# Altium PCB SPILoRav5.PcbDoc
Units mil, origin at the board's own origin, x right, y up, seen from the top; angles counter-clockwise.
Board outline 1120 x 2890 mil, 2 copper layers (Top Layer, Bottom Layer); 32 components, 39 nets, 154 pads, 20 vias.
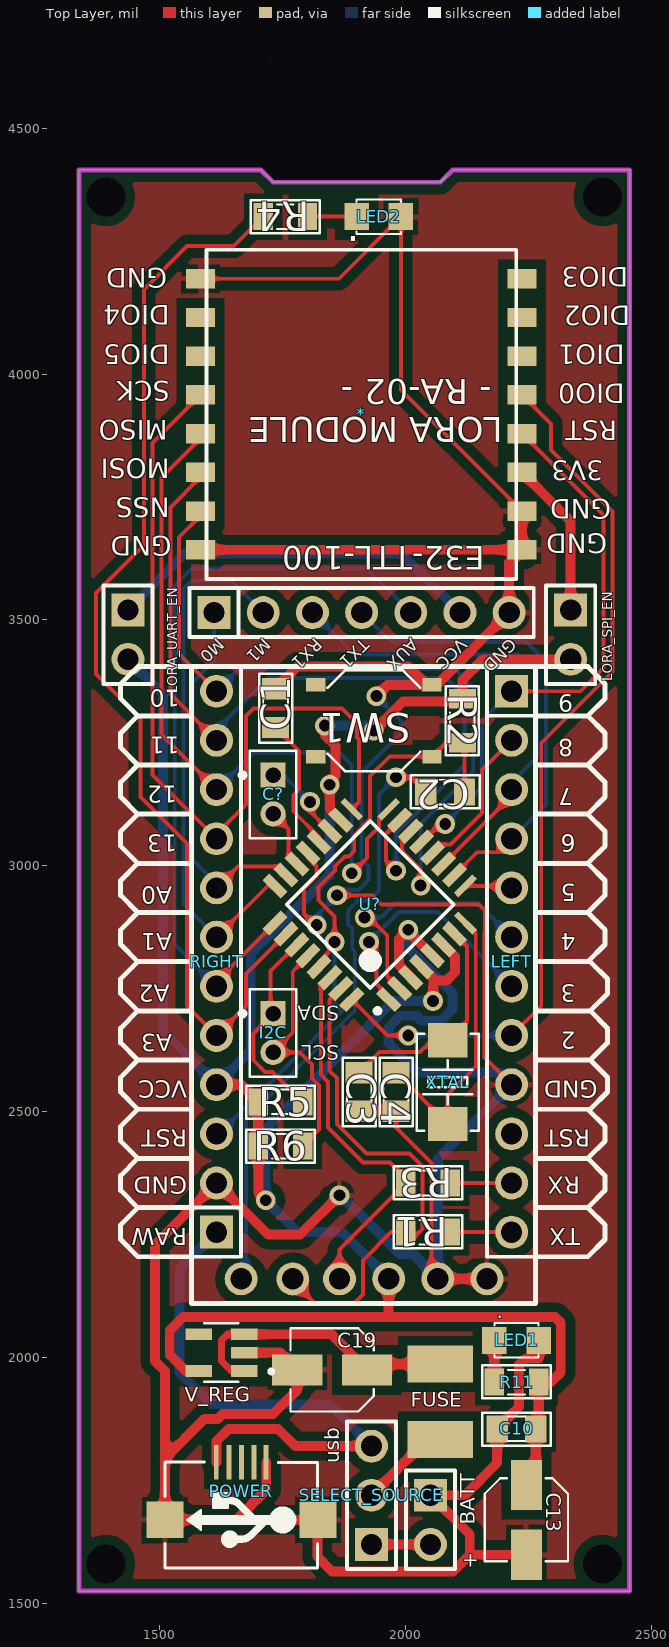
[diagram p0: Top Layer view]
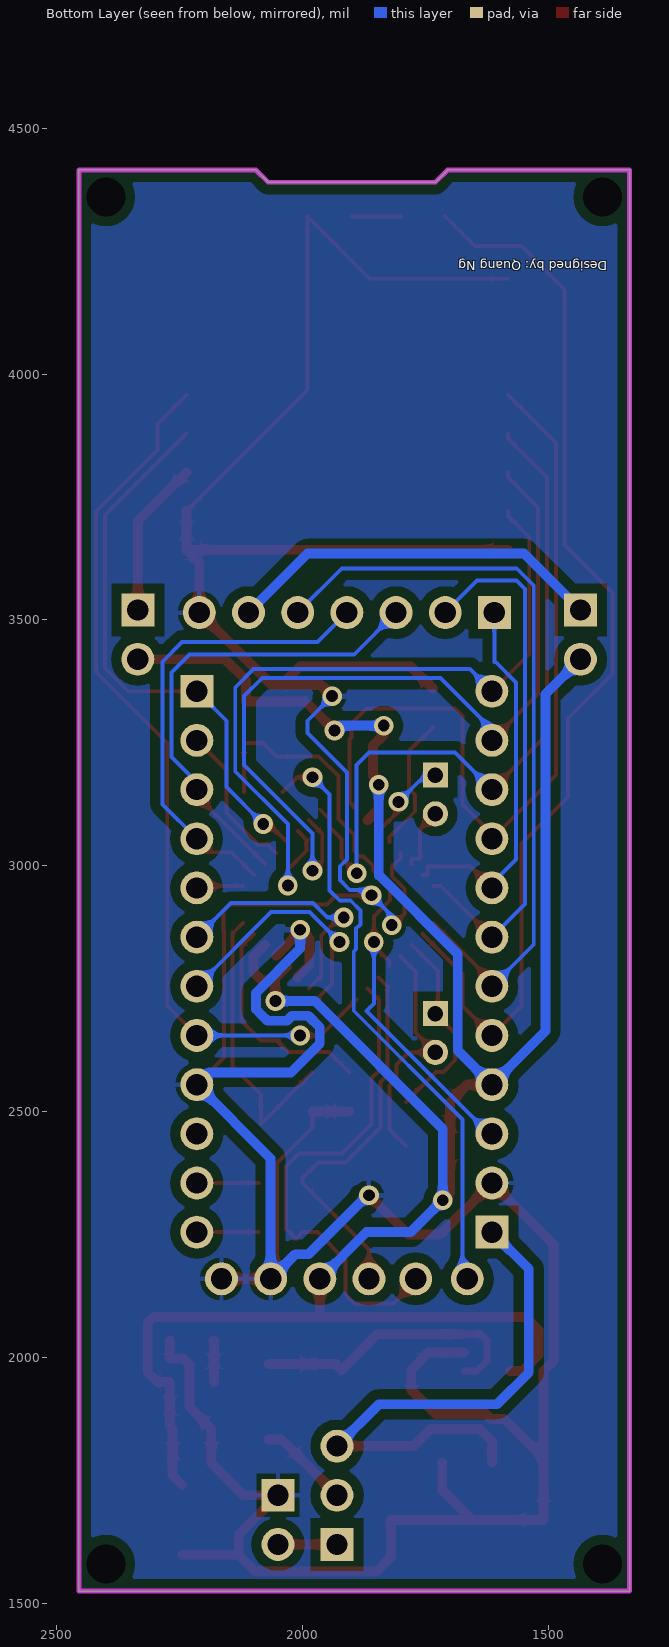
[diagram p1: Bottom Layer view, seen from below]
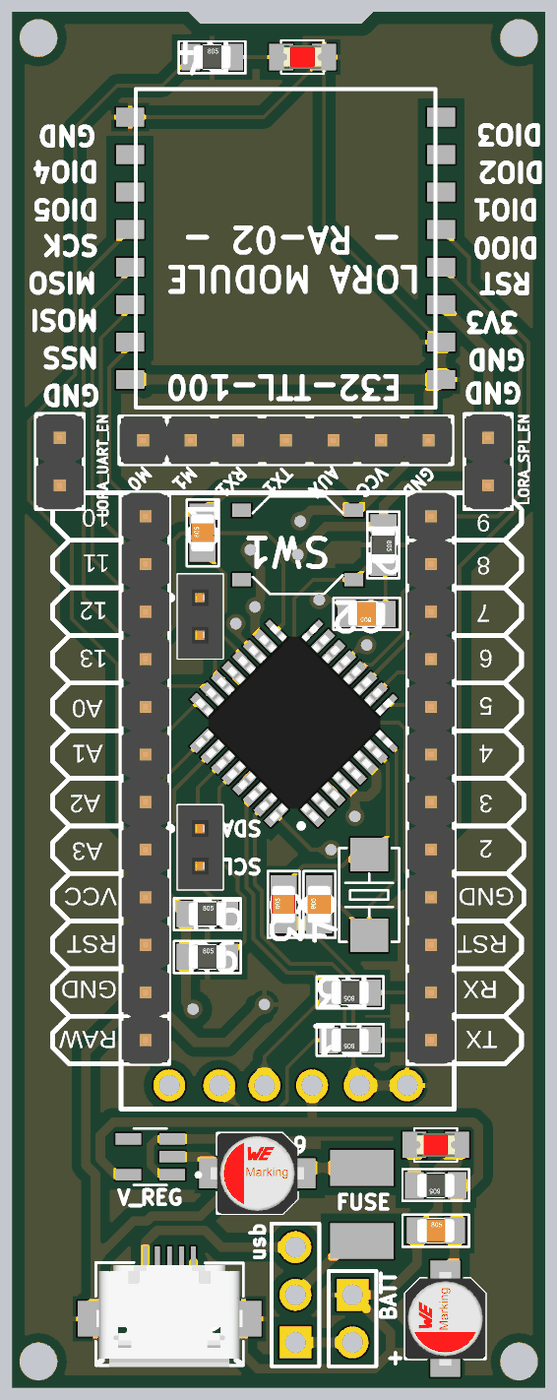
[diagram p2: 3D render of the assembled board from above, using the file's embedded part models]

## Layer stack, top to bottom
Top Solder: solder mask 0.4, Solder Resist, Dk 3.5
Top Layer: signal copper 1.4
Dielectric 1: dielectric 12.6, FR-4, Dk 4.8
Bottom Layer: signal copper 1.4
Bottom Solder: solder mask 0.4, Solder Resist, Dk 3.5

## Board outline
1335,1525 1335,4415 1705,4415 1730,4390 2070,4390 2095,4415 2455,4415 2455,1525

## Design rules (kind name [scope] priority, off if disabled: settings)
Clearance [All] p1: gap=10 ignorepadtopadclearanceinfootprint=FALSE except(0: Arc-Hole Track-Hole SMDPad-Hole THPad-Hole Via-Hole Fill-Hole Poly-Hole Region-Hole Text-Hole; 20: Arc-Poly Track-Poly SMDPad-Poly THPad-Poly Via-Poly Fill-Poly Poly-Poly Poly-Region Poly-Text)
PolygonConnect [All] p1: connectstyle=Relief reliefconductorwidth=10 reliefentries=4 polygonreliefangle="90 Angle" airgapwidth=10
RoutingTopology [All] p1: topology=Daisy_Simple
RoutingVias [All] p1: holewidth=24 width=40 viastyle="Through Hole" minholewidth=24 minwidth=40 maxholewidth=28 maxwidth=50
SolderMaskExpansion [All] p1: expansion=4
Width [All] p1: maxlimit=20 minlimit=8 preferedwidth=8 minimp=50.000000 maximp=50.000000 favimp=50.000000
29 further rules are at their usual default settings.

## Components (designator, comment, footprint, x,y, rotation, side; value= is the part's Value field where it differs from the comment)
* "RA-02" RA-02 1915,3870 r180 top
BATT "Header 2" HDR1X2 2050,1720 r270 top
C1 "0.1uF" CN-SMD-0805 1735.01,3320.63 r90 top value=33pF
C2 "0.1uF" CN-SMD-0805 2080,3150 r180 top value=33pF
C3 "0.1uF" CN-SMD-0805 1905,2540 r90 top value=33pF
C4 "0.1uF" CN-SMD-0805 1980,2540 r90 top value=33pF
C10 "0.1uF" CN-SMD-0805 2225,1855 r0 top value=33pF
C13 "10uF" CAP-ALU-SMD-4.5x5x1.4 2245,1670 r270 top
C19 "10uF" CAP-ALU-SMD-4.5x5x1.4 1850,1975 r180 top
C? "JP2x1-2.0" J2-C1T 1730,3145 r270 top
E32-TTL-100 "JP7" JP7-D1T 1610,3515 r0 top
FUSE "MF-MSMF050-2" *FUSM1812X02 2070,1910 r90 top
I2C "JP2x1-2.0" J2-C1T 1730,2660 r270 top
LED1 "LED" LED-0805-Red 2180,2035 r0 top value="LED 3 - 5 ly 2 Colour"
LED2 "LED" LED-0805-Red 1900,4320 r0 top value="LED 3 - 5 ly 2 Colour"
LEFT "JP12" JP12-D1T 2215,3355 r270 top
LORA_SPI_EN "JP2" JP2-D1T 2335,3520 r270 top
LORA_UART_EN "JP2" JP2-D1T 1435,3520 r270 top
POWER "USB-5" USB-M1 1665.51,1786.84 r180 top
R1 "1K" RES-SMD-0805 2045,2255 r180 top
R2 "10K" RES-SMD-0805 2115,3295 r270 top
R3 "1K" RES-SMD-0805 2045,2355 r180 top
R4 "4.7K" RES-SMD-0805 1755,4320 r0 top
R5 "1K" RES-SMD-0805 1745,2520 r0 top
R6 "1K" RES-SMD-0805 1745,2430 r0 top
R11 "4.7K" RES-SMD-0805 2225,1950 r180 top
RIGHT "JP12" JP12-D1T 1615,2255 r90 top
SELECT_SOURCE "Header 3" HDR1X3 1930,1620 r90 top
SW1 "BUTTON" *SW4-SMD-5.2X5.2X1.5MM 1935,3295 r180 top
U? "ATmega328-AU" TQFP32 1927.58,2921.52 r135 top
V_REG "MIC5205-3.3BM5_TR" *SOT95P280X145-5N 1625,2010 r180 top
XTAL "5032 8MHz" *X2-SMD-5.0X3.2X1.3MM 2085,2560 r270 top

## Footprints (in the part's own frame and the unit in brackets; to place one, negate y for a bottom-side part, rotate by r counter-clockwise, add the part's x,y. Pads: shape width x height; smd on the part's side, far side on the other; paste and mask are expansions set on the pad)
*FUSM1812X02 [mm]
  rect 1.9x3.4 smd: 1(-1.95,0) 2(1.95,0)
*SOT95P280X145-5N [mm]
  rect 1.36x0.6 smd: 1(-1.175,0.95) 2(-1.175,0) 3(-1.175,-0.95) 4(1.175,-0.95) 5(1.175,0.95)
  silkscreen extent -2.67,-1.51 0.88,1.51
*SW4-SMD-5.2X5.2X1.5MM [mm]
  rect 1x0.7 smd: 1(-3,1.85) 2(3,1.85) 3(-3,-1.85) 4(3,-1.85)
  silkscreen extent -2.4,-2.6 2.4,2.6
*X2-SMD-5.0X3.2X1.3MM [mil]
  rect 70x80 smd: 1(-85,0) 2(85,0)
  silkscreen extent -98,-63 98,63
CAP-ALU-SMD-4.5x5x1.4 [mm]
  rect 2.6x1.6 smd: 1(-1.8,0) 2(1.8,0)
  silkscreen extent -2.15,-2.15 2.15,2.15, body extent -2.5,-2.15 2.5,2.15, height 5.45
CN-SMD-0805 [mil]
  rect 43.31x55 smd: 1(-39.37,0.01) 2(39.37,0.01)
  silkscreen extent -70,-34 70,33, body extent -39,-25 39,25, height 31
HDR1X2 [mm] "Connector; Header; 2 Position"
  rect 1.7x1.7 hole 1.1: 1(0,0)
  round 1.7 hole 1.1: 2(2.54,0)
  silkscreen extent -1.27,-1.27 3.81,1.27
HDR1X3 [mm] "Connector; Header; 3 Position"
  rect 1.7x1.7 hole 1.1: 1(0,0)
  round 1.7 hole 1.1: 2(2.54,0) 3(5.08,0)
  silkscreen extent -1.27,-1.27 6.35,1.27
J2-C1T [mm] "2p, 1 row, straight, gold plating"
  rect 1.3x1.3 hole 0.8: 1(-1,0)
  round 1.3 hole 0.8: 2(1,0)
  silkscreen extent -2.25,-1.71 2.25,1.2, body extent -2.25,-1.2 2.25,1.2, height 4.31
JP2-D1T [mm] "2 pins, 1 row, straight, gold plating"
  rect 1.7x1.7 hole 1.1: 1(0,0)
  round 1.7 hole 1.1: 2(2.54,0)
  silkscreen extent -1.27,-1.27 3.81,1.27, body extent -1.27,-1.27 3.81,1.27, height 8.54
JP7-D1T [mm] "7 pins, 1 row, straight, gold plating"
  rect 1.7x1.7 hole 1.1: 1(0,0)
  round 1.7 hole 1.1: 2(2.54,0) 3(5.08,0) 4(7.62,0) 5(10.16,0) 6(12.7,0) 7(15.24,0)
  silkscreen extent -1.27,-1.27 16.51,1.27, body extent -1.27,-1.27 16.51,1.27, height 8.54
JP12-D1T [mm] "12 pins, 1 row, straight, gold plating"
  rect 1.7x1.7 hole 1.1: 1(0,0)
  round 1.7 hole 1.1: 2(2.54,0) 3(5.08,0) 4(7.62,0) 5(10.16,0) 6(12.7,0) 7(15.24,0) 8(17.78,0) 9(20.32,0) 10(22.86,0) 11(25.4,0) 12(27.94,0)
  silkscreen extent -1.27,-1.27 29.21,1.27, body extent -1.27,-1.27 29.21,1.27, height 8.54
LED-0805-Red [mil]
  rect 50x55 smd: 1(0,0) 2(90,0)
  silkscreen extent 0,-35 90,35, body extent 5,-25 85,25, height 43
RA-02 [mm]
  rect 1.5x1 smd: 1(-8.157,5.776) 2(-8.157,3.776) 3(-8.157,1.776) 4(-8.157,-0.224) 5(-8.157,-2.224) 6(-8.157,-4.224) 7(-8.157,-6.224) 8(-8.157,-8.224) 9(8.443,-8.224) 10(8.443,-6.224) 11(8.443,-4.224) 12(8.443,-2.224) 13(8.443,-0.224) 14(8.443,1.776) 15(8.443,3.776) 16(8.443,5.776)
  silkscreen extent -7.86,-9.72 8.14,7.28
RES-SMD-0805 [mil]
  rect 39.37x55 smd: 1(-45,0) 2(45,0)
  silkscreen extent -70,-34 70,33, body extent -39,-25 39,25, height 31
TQFP32 [mm] "Thin QFP, 32-Leads, Body 9x9mm, Pitch 0.8mm, IPC Low Density"
  rect 1.35x0.508 smd: 1(-4.15,2.8) 2(-4.15,2) 3(-4.15,1.2) 4(-4.15,0.4) 5(-4.15,-0.4) 6(-4.15,-1.2) 7(-4.15,-2) 18(4.15,-2) 19(4.15,-1.2) 20(4.15,-0.4) 21(4.15,0.4) 22(4.15,1.2) 23(4.15,2) 24(4.15,2.8)
  rect 1.35x0.33 smd: 8(-4.15,-2.8) 17(4.15,-2.8)
  rect 0.33x1.35 smd: 9(-2.8,-4.15) 16(2.8,-4.15)
  rect 0.508x1.35 smd: 10(-2,-4.15) 11(-1.2,-4.15) 12(-0.4,-4.15) 13(0.4,-4.15) 14(1.2,-4.15) 15(2,-4.15) 25(2.8,4.15) 26(2,4.15) 27(1.2,4.15) 28(0.4,4.15) 29(-0.4,4.15) 30(-1.2,4.15) 31(-2,4.15) 32(-2.8,4.15)
  silkscreen extent -4.27,-3.05 3.05,3.75, body extent -4.5,-4.5 4.5,4.5, height 1.4
USB-M1 [mil]
  rect 10x70 smd: 1(51.18,0) 2(25.59,0) 3(0,0) 4(-25.59,0) 5(-50,0)
  rect 74.8x74.8 smd: 5(-155.51,116.84) 5(155.51,116.84)
  silkscreen extent -155,-1 155,215, body extent -157,5 158,218, height 107

## Part data
BATT: "Header, 2-Pin", LatestRevisionDate=17-Jul-2002, LatestRevisionNote="Re-released for DXP Platform.", Publisher="Altium Limited"
C1 C2 C3 C4 C10: library part CN
C13 C19: library part CN-ALU-SMD, "Polarized Capacitor (Axial)", LatestRevisionDate=17-Jul-2002, LatestRevisionNote="Re-released for DXP Platform.", PackageReference=POLAR0.8, Published=8-Jun-2000, Publisher="Altium Limited"
C? I2C: "WR-PHD 2.00 mm Socket Header", Manufacturer="Würth Elektronik eiSos GmbH", partNo=62000211821, ComponentLink1 Description=Manufacturer, ComponentLink1URL=http://www.we-online.com, ComponentLink2 Description=Datasheet, ComponentLink2URL=http://katalog.we-online.de/em/datasheet/6200xx11821.pdf, Created by="Karrer Zheng", Created Date="2 April 2013", NoPins=02
E32-TTL-100: "WR-PHD 2.54 mm Angled Socket Header", Manufacturer="Würth Elektronik eiSos GmbH", partNo=613007143121, ComponentLink1 Description=Manufacturer, ComponentLink1URL=http://www.we-online.com, ComponentLink2 Description=Datasheet, ComponentLink2URL=http://katalog.we-online.de/em/datasheet/6130xx143121.pdf, Created by="Karrer Zheng", Created Date="29 March 2013", NoPins=07
FUSE: "PTC Resettable Fuse 0.5A_hold_ 1A_trip_ 15V 100A 0.8W 0.15s 0.15Ohm SMD Solder Pad 1812 T/R", Package="1812 Bourns", Availability=Unavailable, MF=Bourns, MP=MF-MSMF050-2, Price=None, SnapEDA_Link=https://www.snapeda.com/parts/MF-MSMF050-2/Bourns%20-%20J.W.%20Miller/view-part/?ref=snap
LED1 LED2: library part "LED SMD"
LEFT RIGHT: "WR-PHD 2.54 mm Angled Socket Header", Manufacturer="Würth Elektronik eiSos GmbH", partNo=613012143121, ComponentLink1 Description=Manufacturer, ComponentLink1URL=http://www.we-online.com, ComponentLink2 Description=Datasheet, ComponentLink2URL=http://katalog.we-online.de/em/datasheet/6130xx143121.pdf, Created by="Karrer Zheng", Created Date="29 March 2013", NoPins=12
LORA_SPI_EN LORA_UART_EN: "WR-PHD 2.54 mm Angled Socket Header", Manufacturer="Würth Elektronik eiSos GmbH", partNo=613002143121, ComponentLink1 Description=Manufacturer, ComponentLink1URL=http://www.we-online.com, ComponentLink2 Description=Datasheet, ComponentLink2URL=http://katalog.we-online.de/em/datasheet/6130xx143121.pdf, Created by="Karrer Zheng", Created Date="29 March 2013", NoPins=02
POWER: Manufacturer=FCI, Manufacturer Part Number=10118193-0001LF, Supplier Part Number 1=609-4616-1-ND, .Checked PCB=RF, .Checked SCH=MM, .Creator=MM, Category="Connectors, Interconnects", ComponentLink1Description=http://portal.fciconnect.com/Comergent//fci/drawing/10118193.pdf, ComponentLink1URL=http://portal.fciconnect.com/Comergent//fci/drawing/10118193.pdf, Connector Type="USB - micro B", Features="Shielded, Solder Retention", Gender=Receptacle, Ingress Protection=-, Mounting Type="Surface Mount, Right Angle, Horizontal", Number of Contacts=5, Packaging="Cut Tape (CT)", Pricing 1="1=0.46, 10=0.433, 25=0.3712, 50=0.3156, 100=0.3032, 250=0.27224, 500=0.25988 (USD)", RoHS="RoHS Compliant", Specifications="USB 2.0", Stock 1=28642, Supplier 1=Digi-Key
R1 R2 R3 R4 R5 R6 R11: library part Res-SMD, "Resistor", Manufacturer="Generic Components", Class=Passive, Published=08/06/2000, Publisher="Altium Hobart Technology Centre"
SELECT_SOURCE: "Header, 3-Pin", LatestRevisionDate=17-Jul-2002, LatestRevisionNote="Re-released for DXP Platform.", Publisher="Altium Limited"
SW1: library part SMD-BUTTON(4P-5.2X5.2X1.5MM-SKQGAKE010), "Switch Tactile N.O. SPST Button Gull Wing 0.05A 12VDC 3.43N SMD T/R", Package=None, Availability=Unavailable, MF=ALPS, MP=SKQGAKE010, Price=None, SnapEDA_Link=https://www.snapeda.com/parts/SKQGAKE010/ALPS/view-part/?ref=snap
U?: "8-bit AVR Microcontroller, 32KB Flash, 1KB EEPROM, 2KB SRAM, 32-pin TQFP, Industrial Grade (-40癈 to 85癈)", Supplier Part Number 1=ATMEGA328-AU-ND, Code_JEDEC=MS-026-ABA, ComponentLink1Description="Manufacturer Link", ComponentLink1URL=http://www.atmel.com/products/avr/default.asp?, ComponentLink2Description="ATmega48A/48PA/88A/88PA/168A/168PA/328/328P Datasheet", ComponentLink2URL=http://www.atmel.com/dyn/resources/prod_documents/8271.pdf, ComponentLink3Description="ATmega48A/48PA/88A/88PA/168A/168PA/328/328P Summary", ComponentLink3URL=http://www.atmel.com/dyn/resources/prod_documents/8271S.pdf, ComponentLink4Description="Atmel.com Home", ComponentLink4URL=http://www.atmel.com, DatasheetVersion="revA, Jan-2010", PackageDescription="32-Lead, 7x7x1.0 mm Body, 0.8mm Lead Pitch, Thin Profile Plastic Quad Flat Package (TQFP)", PackageReference=32A, PackageVersion="revB, Oct-2001", Published=1-Apr-2010, Publisher="Altium Limited", Supplier 1=Digi-Key, Supplier 2=Mouser, Supplier Part Number 2=556-ATMEGA328-AU
V_REG: "Ic Reg Ldo 3.3v 0.15a Sot23-5", Package="SOT-23-5 Micrel", Availability=Unavailable, MF=Micrel, MP="MIC5205-3.3BM5 TR", Price=None, SnapEDA_Link=https://www.snapeda.com/parts/MIC5205-3.3BM5%20TR/Micrel/view-part/?ref=snap
XTAL: library part SMD-CRYSTAL-8MHZ-20PF-20PPM(2P-5.0X3.2MM), "SMD Crystal 8MHz-20pF-20ppm;", Package=None, Availability=Unavailable, MF=Xinhunjing, MP=5032/4P, Price=None, SnapEDA_Link=https://www.snapeda.com/parts/5032/4P/Xinhunjing/view-part/?ref=snap

## Free pads (board coordinates)
  round 66.93 hole 43.31: 3(1665,2160) 3(1770,2160) 3(1865,2160) 3(1965,2160) 3(2065,2160) 3(2165,2160)
  round 60 hole 78.74: 4(1390,1580) 4(1390,4360) 4(2400,1580) 4(2400,4360)

## Via types
v1: diameter 40, hole 24, Top Layer to Bottom Layer, tented both sides, 20 vias

## Nets (pads, with @x,y where several pads share a name; then routed paths per layer and width w, separated by ;. In a path a pad name is that pad's centre, name@x,y a point inside that pad or via, vN(x,y) a via of type N, cw(c..) or ccw(c..) an arc to the next point about the centre after c; other vN are vias at no path point)
AUX: E32-TTL-100.5 RIGHT.6 U?.25 | length 1560.3
  Top Layer w8: RIGHT.6 1615,2764.84 U?.25
  Bottom Layer w8: RIGHT.6 1530,2840 1530,3570 1565,3605 1920,3605 E32-TTL-100.5
B1: *.4 LEFT.1 U?.13 | length 1141.2
  Top Layer w8: U?.13 2068.79,3085 v1(2080,3085) ; LEFT.1 2355,3355 2402,3402 2402,3712.96 *.4
  Bottom Layer w8: v1(2080,3085) 2155,3160 2155,3295 LEFT.1
BATT: BATT.2 SELECT_SOURCE.1 | length 120
  Top Layer w20: SELECT_SOURCE.1 BATT.2
D2: *.5 LEFT.8 U?.32 | length 1840.1
  Top Layer w8: U?.32 1963.04,2655 v1(2005,2655) ; LEFT.8 2275.23,2715.23 2275.23,3249.77 2420,3394.54 2420,3720.42 2295,3845.42 2295,3898.7 *.5
  Bottom Layer w8: v1(2005,2655) LEFT.8 LEFT.8@2230,2670
D3: LEFT.7 U?.1 | length 511.4
  Top Layer w8: v1(1925,2845) 1940,2830 1940,2760 1965.16,2734.84 U?.1
  Bottom Layer w8: v1(1925,2845) 1986,2906 2064,2906 LEFT.7
GND: *.1 *.2 *.9 *.16 BATT.1 C1.2 C3.1 C4.1 C10.1 C13.2 C19.2 E32-TTL-100.7 LED1.2 LED2.2 LEFT.9 pad.3@2065,2160 pad.3@2165,2160 POWER.5 RIGHT.2 SW1.3 U?.3 U?.5 U?.21 V_REG.2 | length 9477.8
  Top Layer w8: *.9 1863.78,4193.78 LED2.2 1990,3967.48 *.2 ; U?.21 1800.92,3015.31 1818.51,2997.72 1818.51,2978.8 1793,2953.3 1793,2902 1815.62,2879.38 v1(1818.67,2879.38) ; v1(1860,2940) 1931.71,2940 1950,2921.71 2148.29,2921.71 2160.92,2909.08 2160.92,2866.42 2160.11,2865.61 2160.11,2609.89 LEFT.9 LEFT.9@2215,2565 ; C4.1 1979.99,2467.45 2051.69,2395.75 2051.69,2173.31 pad.3@2065,2160
  Top Layer w20: *.16 *.1 ; V_REG.2 1744.13,2010 C19.2 1779.13,1934.13 1730,1885 1627.37,1885 1617.37,1875 1590,1875 1510,1795 ; POWER.5@1716.1,1786.84 1716.1,1731.1 1655,1670 ; C1.2 1780,3405 2005,3405 SW1.3@2042.17,3367.83 ; v1(1865,2330) 1785,2250 1720,2250 RIGHT.2 1490,2230 1490,1992.57 1510,1972.57 1510,1795 ; C3.1 C4.1 ; v1(1940,3345) 1962.83,3367.83 SW1.3@2042.17,3367.83 ; U?.3 2009.71,2774.7 1986.12,2798.29 1986.12,2851.12 v1(2005,2870) 2005,2866.37 U?.5 ; pad.3@2065,2160 pad.3@2165,2160 ; *.2 *.1 ; C13.2 2130,1599.13 ; LED1.2 2270,1997.5 2242.03,1997.5 2230.32,1985.78 2230.32,1899.69 C10.1 2185.64,1785.64 2120,1720 BATT.1 2130,1640 2130,1599.13 ; 1510,1795 1510,1670 1655,1670 ; 1655,1670 1821.02,1670 1820,1668.98 1820,1595 1850,1565 2095.87,1565 2130,1599.13 ; SW1.3@2042.17,3367.83 SW1.3 2062.83,3367.83 E32-TTL-100.7 2210,3616.46 *.1
  Bottom Layer w8: v1(1818.67,2879.38) 1818.67,2891.33 1815,2895 v1(1860,2940) 1871,2951 1904.08,2951 1924,2970.92 1924,2999.08 1910,3013.08 1910,3190 1990,3270 1990,3295 v1(1940,3345)
  Bottom Layer w20: v1(1865,2330) 1867.83,2330 1987.83,2210 2015,2210 2065,2160 2065,2405 LEFT.9 2190,2580 2023.43,2580 1965,2638.43 1965,2671.57 1988.43,2695 2021.57,2695 2031.57,2685 2071.57,2685 2083.28,2696.72 2095,2708.43 2095,2741.57 2005,2831.57 v1(2005,2870)
LORA_SPI_VCC: *.3 LORA_SPI_EN.1 | length 321
  Top Layer w20: *.3 2335,3701.22 LORA_SPI_EN.1
LORA_UART_VCC: E32-TTL-100.6 LORA_UART_EN.1 | length 772.3
  Bottom Layer w20: LORA_UART_EN.1 1550,3635 1990,3635 E32-TTL-100.6
M0: E32-TTL-100.1 RIGHT.8 U?.23 | length 777.3
  Top Layer w8: RIGHT.8 1658.96,2998.96 1745.77,2998.96 1745.77,2981.37 U?.23
  Bottom Layer w8: E32-TTL-100.1 1610,3414.34 1607.22,3414.34 1566,3373.12 1566,3013.01 1615,2964.01 RIGHT.8
M1: E32-TTL-100.2 RIGHT.7 U?.24 | length 1093.7
  Top Layer w8: RIGHT.7 1719.1,2959.1 U?.24
  Bottom Layer w8: RIGHT.7 1548,2922 1548,3562.54 1565.46,3580 1645,3580 E32-TTL-100.2
MISO: *.13 RIGHT.10 U?.16 | length 1500.7
  Top Layer w8: *.13 1582.6,3869.09 1503.07,3789.56 1503.07,3266.93 RIGHT.10 ; v1(1890,2985) 1920.71,3015.71 1920.71,3054.38 1945.39,3079.05 1945.39,3095.22 U?.16
  Bottom Layer w8: RIGHT.10 1690,3230 1865,3230 1890,3205 v1(1890,2985)
MOSI: *.14 RIGHT.11 U?.15 | length 1729.2
  Top Layer w8: *.14 1582.6,3790.35 1521.07,3728.82 1521.07,3348.93 RIGHT.11 ; v1(1980,2990) 1960,3010 1960,3065.29 U?.15
  Bottom Layer w8: RIGHT.11 1615,3277 1720,3382 2082,3382 2119,3345 2119,3204.58 1980,3065.58 v1(1980,2990)
NetC1_1: C1.1 U?.20 | length 279.7
  Top Layer w8: C1.1 1783.2,3233.06 1783.2,3156.29 1771,3144.08 1771,3110.97 1823.19,3058.79 U?.20
NetC2_2: C2.2 pad.3@1665,2160 | length 1247.8
  Top Layer w8: v1(1980,3180) 2010.62,3180 C2.2
  Bottom Layer w8: pad.3@1665,2160 1675,2170 1675,2484.18 1896,2705.18 1896,2825.92 1891,2830.92 1891,2872.08 1882.17,2880.92 1882.17,2909.08 1902.08,2929 1924,2929 1945,2950 1945,3145 v1(1980,3180)
NetC3_2: C3.2 U?.7 XTAL.1 | length 452.9
  Top Layer w8: C3.2 1946.62,2621 2029.08,2621 2049,2640.92 2049,2645 XTAL.1 2124.11,2684.11 2124.11,2836.35 U?.7
NetC4_2: C4.2 U?.8 XTAL.2 | length 589.6
  Top Layer w8: C4.2 1980.63,2579.37 XTAL.2 2085,2535 2142.11,2592.11 2142.11,2862.89 U?.8
NetC19_1: C19.1 FUSE.2 V_REG.1 V_REG.3 | length 581.8
  Top Layer w15: V_REG.1 1645.33,1972.6 1625,1992.93 1625,2035 1637.4,2047.4 V_REG.3
  Top Layer w20: V_REG.3 1848.46,2047.4 C19.1 1932.64,1986.77 FUSE.2
NetC?_1: C?.1 U?.19 | length 175.4
  Top Layer w8: C?.1 C?.1@1731.55,3184.37 ; v1(1805,3130) 1805,3110.92 U?.19
  Bottom Layer w8: C?.1 1750.63,3184.37 v1(1805,3130)
NetC?_2: C?.2 U?.22 | length 132.4
  Top Layer w8: C?.2 1761.05,3074.58 1761.05,3014.25 1778.64,3014.25 U?.22
NetFTDI_4: pad.3@1865,2160 R3.2 U?.30 | length 780.3
  Top Layer w8: U?.30 1827,2754.12 1827,2575.44 1841.68,2560.75 1841.68,2467.86 1912.54,2397 1968,2397 2000,2365 R3.2 1865,2220 pad.3@1865,2160
NetFTDI_5: pad.3@1770,2160 R1.2 U?.31 | length 1029.6
  Top Layer w8: pad.3@1770,2160 1770,2155 1815,2110 1894.59,2110 1912.46,2127.88 1912.46,2197.46 1970,2255 R1.2 2013.69,2241.32 2033.69,2261.31 2033.69,2388.3 2006.98,2415 1920,2415 1859.68,2475.32 1859.68,2568.21 1845,2582.89 1845,2727.58 U?.31
NetFUSE_1: FUSE.1 SELECT_SOURCE.2 | length 186.9
  Top Layer w20: SELECT_SOURCE.2 2043.23,1833.23 FUSE.1
NetI2C_1: I2C.1 R5.2 U?.27 | length 410.7
  Top Layer w8: U?.27 1725,2785.75 1725,2704.37 I2C.1 1690,2659.37 1690,2604.64 1713.6,2581.04 1728.96,2581.04 R5.2
NetI2C_2: I2C.2 R6.2 U?.28 | length 501.1
  Top Layer w8: R6.2 1823.68,2463.69 1823.68,2553.3 1809,2567.98 1809,2596 1784.37,2620.63 I2C.2 1770,2660.63 1770,2785 1800.92,2815.92 U?.28
NetLED1_1: LED1.1 R11.2 | length 85
  Top Layer w20: R11.2 LED1.1
NetLED2_1: LED2.1 R4.2 | length 100
  Top Layer w8: R4.2 LED2.1
NetLEFT_2: LEFT.2 U?.12 | length 306.8
  Top Layer w8: U?.12 2071.84,3043.51 2090.93,3043.51 2155,3107.58 2155,3116.66 ; 2155.02,3116.68 2155.02,3195.02 LEFT.2
NetLEFT_5: LEFT.5 U?.9 | length 95.6
  Top Layer w8: U?.9 2210.9,2959.1 LEFT.5
NetLEFT_6: LEFT.6 U?.2 | length 518.8
  Top Layer w8: v1(1916.17,2895) 1925,2895 1962.12,2857.88 1962.12,2775.63 U?.2
  Bottom Layer w8: v1(1916.17,2895) 1949.54,2895 1978.54,2924 2146,2924 LEFT.6
NetLEFT_11: LEFT.11 R3.1 | length 146.2
  Top Layer w8: R3.1 LEFT.11 LEFT.11@2200,2340
NetLEFT_12: LEFT.12 R1.1 | length 125
  Top Layer w8: R1.1 LEFT.12
NetR4_1: R4.1 RIGHT.5 U?.26 | length 2228.2
  Top Layer w8: R4.1 1650,4260 1555,4260 1467.07,4172.07 1467.07,3652.07 1370,3555 1370,3390 1460,3300 1460,3140 1555,3045 1555,2715 RIGHT.5 1675,2715 1675,2780.29 U?.26
RAW: POWER.1 RIGHT.1 SELECT_SOURCE.3 | length 1151.6
  Top Layer w20: POWER.1 1614.92,1787.43 1614.92,1830.13 1639.79,1855 1740,1855 1775,1820 SELECT_SOURCE.3
  Bottom Layer w20: RIGHT.1 1540,2180 1540,1970 1605,1905 1845,1905 SELECT_SOURCE.3
RESET: C2.1 R2.2 RIGHT.3 SW1.1 U?.29 | length 1286.8
  Top Layer w8: U?.29 1823.19,2805.45 1855,2837.27 v1(1855,2845) 1855,2896.92 1821.92,2930 1821.92,2953.24 1820.16,2955 1856,2990.84 1856,2999.08 1875.92,3019 1884.16,3019 1895,3029.84 1895,3062.62 1927.39,3095.01 1927.39,3182.39 1967.17,3222.17 SW1.1 2080.95,3250 R2.2 2119.36,3245.64 C2.1
  Bottom Layer w8: RIGHT.3 1620.36,2455 1870,2704.64 1855,2719.64 v1(1855,2845)
RX1: E32-TTL-100.3 LEFT.3 U?.11 | length 975.8
  Top Layer w8: U?.11 2215,3142.12 LEFT.3
  Bottom Layer w8: E32-TTL-100.3 1895,3430 2230,3430 2267,3393 2267,3221.5 2215,3169.5 LEFT.3
SCK: *.12 RIGHT.9 U?.17 | length 1698.6
  Top Layer w8: *.12 1485.07,3860.03 1485.07,3184.93 RIGHT.9 1615,3065 1675,3125 1675,3305 1690,3320 1870,3320 1901,3289 1901,3260.92 1905,3256.92 1905,3130 U?.17
SS: *.15 RIGHT.12 U?.14 | length 1552.5
  Top Layer w8: *.15 1582.6,3711.61 1539.07,3668.08 1539.07,3430.93 RIGHT.12 ; U?.14 1992.12,3052.87 1992.12,3030.67 2030,2992.78 v1(2030,2960)
  Bottom Layer w8: RIGHT.12 1660,3400 2100,3400 2137,3363 2137,3192 2030,3085 v1(2030,2960)
TX1: E32-TTL-100.4 LEFT.4 U?.10 | length 952.1
  Top Layer w8: U?.10 2145,3027.58 2187.58,3027.58 LEFT.4
  Bottom Layer w8: E32-TTL-100.4 1970,3455 2245,3455 2285,3415 2285,3125 LEFT.4
VCC: C10.2 C13.1 LORA_SPI_EN.2 LORA_UART_EN.2 pad.3@1965,2160 R2.1 R5.1 R6.1 R11.1 RIGHT.4 U?.4 U?.6 U?.18 V_REG.5 | length 5250.9
  Top Layer w20: V_REG.5 1552.4,1972.6 1520,2005 1520,2055.53 1546.97,2082.5 1960,2082.5 ; RIGHT.4 1665,2555 R5.1 R6.1 1700,2335 v1(1715,2320) ; v1(1835,3285) 1835,3265.8 1856.58,3244.23 1856.58,3182.97 1845.46,3171.85 1845.46,3115 U?.18 ; v1(1935,3275) 1994.05,3334.05 2115,3334.05 R2.1 2115,3377.57 2157.43,3420 LORA_SPI_EN.2 ; pad.3@1965,2160 1965,2087.5 1960,2082.5 ; U?.4 2055,2771.83 2055.57,2771.83 2055.57,2771.26 ; v1(2055,2725) 2055.57,2725.57 2055.57,2771.26 ; U?.6 2100.11,2815.8 2100.11,2783.85 2083.13,2766.87 2059.96,2766.87 2055.57,2771.26 ; C13.1 2264.37,1760.24 C10.2 2270,1860.63 R11.1 2295,1950 2315,1970 2315,2070.78 2303.28,2082.5 1960,2082.5
  Bottom Layer w20: LORA_UART_EN.2 1506,3349 1506,2664 RIGHT.4 1684.41,2624.41 1684.41,2820.98 1843.43,2980 1845,2980 v1(1845,3165) ; v1(1835,3285) 1925,3285 v1(1935,3275) ; pad.3@1965,2160 1870,2255 1780,2255 v1(1715,2320) 1715,2465 1975,2725 v1(2055,2725)
pads on no net: *.6 *.7 *.8 *.10 *.11 LEFT.10 POWER.2 POWER.3 POWER.4 SW1.2 SW1.4 V_REG.4

## Polygon pours and split planes (outlines as drawn)
GND on Top Layer (solid, pour order 8): 1335,4415 1705,4415 1730,4390 2070,4390 2095,4415 2455,4415 2455,1525 1335,1525
GND on Bottom Layer (solid, pour order 10): 1335,4415 1705,4415 1730,4390 2070,4390 2095,4415 2455,4415 2455,1525 1335,1525

## Keep-outs
Top Layer:
  region: 1725,4645
Keep-Out Layer:
  the board outline again, w10

## Silkscreen, mask and mechanical layers (free items; w line width, h text height)
Top Overlay:
  lines w10: 1560,2305 1455,2305 ; 1560,2405 1455,2405 ; 1560,2505 1455,2505 ; 1560,2605 1455,2605 ; 1560,2705 1455,2705 ; 1560,2805 1455,2805 ; 1560,2905 1455,2905 ; 1560,3005 1455,3005 ; 1560,3105 1455,3105 ; 1560,3205 1455,3205 ; 1560,3305 1455,3305 ; 1560,3405 1455,3405 1420,3370 1420,3340 1455,3305 ; 1561.25,2205 1455,2205 1420,2240 1420,2270 1455,2305 ; 1561.25,2305 1455,2305 ; 1561.25,2405 1455,2405 ; 1561.25,2505 1455,2505 ; 1561.25,2605 1455,2605 ; 1561.25,2705 1455,2705 ; 1561.25,2805 1455,2805 ; 1561.25,2905 1455,2905 ; 1561.25,3005 1455,3005 ; 1561.25,3105 1455,3105 ; 1561.25,3205 1455,3205 ; 1561.25,3305 1455,3305 ; 1563.75,3400 1563.75,2110 2263.75,2110 2263.75,3405 ; 1563.75,3405 2263.75,3405 ; 2263.75,2305 2370,2305 ; 2263.75,2405 2370,2405 ; 2263.75,2505 2370,2505 2405,2470 2405,2440 2370,2405 ; 2263.75,2905 2370,2905 ; 2263.75,3005 2370,3005 ; 2263.75,3105 2370,3105 ; 2263.75,3205 2370,3205 ; 2263.75,3305 2370,3305 ; 2265,2205 2370,2205 2405,2240 2405,2270 2370,2305 ; 2265,2305 2370,2305 ; 2265,2405 2370,2405 ; 2265,2805 2370,2805 2405,2840 2405,2870 2370,2905 ; 2265,2905 2370,2905 ; 2265,3005 2370,3005 ; 2265,3105 2370,3105 ; 2265,3205 2370,3205 ; 2265,3305 2370,3305 ; 2268.75,2605 2375,2605 ; 2268.75,2705 2375,2705 ; 2268.75,2805 2375,2805 2410,2770 2410,2740 2375,2705 ; 2270,2505 2375,2505 2410,2540 2410,2570 2375,2605 ; 2270,2605 2375,2605 ; 2270,2705 2375,2705 ; 1455,2305 1420,2340 1420,2370 1455,2405 ; 1455,2405 1420,2440 1420,2470 1455,2505 ; 1455,2505 1420,2540 1420,2570 1455,2605 ; 1455,2605 1420,2640 1420,2670 1455,2705 ; 1455,2705 1420,2740 1420,2770 1455,2805 ; 1455,2805 1420,2840 1420,2870 1455,2905 ; 1455,2905 1420,2940 1420,2970 1455,3005 ; 1455,3005 1420,3040 1420,3070 1455,3105 ; 1455,3105 1420,3140 1420,3170 1455,3205 ; 1455,3205 1420,3240 1420,3270 1455,3305 ; 2263.75,3405 2370,3405 2405,3370 2405,3340 2370,3305 ; 2370,2305 2405,2340 2405,2370 2370,2405 ; 2370,2905 2405,2940 2405,2970 2370,3005 ; 2370,3005 2405,3040 2405,3070 2370,3105 ; 2370,3105 2405,3140 2405,3170 2370,3205 ; 2370,3205 2405,3240 2405,3270 2370,3305 ; 2375,2605 2410,2640 2410,2670 2375,2705
  text "." at 1880,4270 h60
  text "M0" at 1615,3465 h25 r225
  text "M1" at 1710,3465 h25 r225
  text "RX1" at 1815,3465 h25 r225
  text "TX1" at 1910,3465 h25 r225
  text "AUX" at 2010,3465 h25 r225
  text "VCC" at 2110,3465 h25 r225
  text "GND" at 2210,3465 h25 r225
  text "10" at 1540,3370 h60 r180
  text "9" at 2340,3360 h60 r180
  text "11" at 1540,3275 h60 r180
  text "8" at 2340,3270 h60 r180
  text "12" at 1535,3175 h60 r180
  text "7" at 2340,3170 h60 r180
  text "13" at 1535,3075 h60 r180
  text "6" at 2345,3075 h60 r180
  text "5" at 2345,2975 h60 r180
  text "A0" at 1525,2970 h60 r180
  text "A1" at 1525,2875 h60 r180
  text "4" at 2345,2875 h60 r180
  text "A2" at 1520,2770 h60 r180
  text "3" at 2345,2770 h60 r180
  text "SDA" at 1865,2715 h30 r180
  text "2" at 2345,2675 h60 r180
  text "A3" at 1525,2670 h60 r180
  text "SCL" at 1865,2635 h30 r180
  text "VCC" at 1555,2575 h60 r180
  text "GND" at 2390,2575 h60 r180
  text "RST" at 1555,2475 h60 r180
  text "RST" at 2375,2475 h60 r180
  text "GND" at 1555,2380 h60 r180
  text "RX" at 2355,2380 h60 r180
  text "RAW" at 1555,2275 h60 r180
  text "TX" at 2355,2275 h60 r180
  text "." at 2185,2080 h30
  text "usb" at 1865,1785 h30 r90
  text "+" at 2115,1575 h30
Bottom Overlay:
  text "Designed by: Quang Ng" at 1380,4235 h31.5 r180

## Text inside footprints (layer, text, board x,y; h text height)
*: Top Overlay "DIO3" at 2452.68,4217.4 h39.37 r180; Top Overlay "DIO2" at 2456.61,4138.66 h39.37 r180; Top Overlay "SCK" at 1520,3985 h39.37 r180; Top Overlay "DIO1" at 2444.8,4059.92 h39.37 r180; Top Overlay "DIO0" at 2445,3980 h39.37 r180; Top Overlay "MOSI" at 1519.61,3827.64 h39.37 r180; Top Overlay "NSS" at 1519.61,3748.9 h39.37 r180; Top Overlay "GND" at 1515,4215 h39.37 r180; Top Overlay "GND" at 1523.54,3670.16 h39.37 r180; Top Overlay "DIO4" at 1520,4140 h39.37 r180; Top Overlay "DIO5" at 1520,4060 h39.37 r180; Top Overlay "LORA MODULE /  - RA-02 -" at 2196.77,3989.06 h51.18 r180; Top Overlay "GND" at 2417.24,3744.96 h39.37 r180; Top Overlay "RST" at 2430,3905 h39.37 r180; Top Overlay "3V3" at 2401.5,3823.7 h39.37 r180; Top Overlay "GND" at 2410,3675 h39.37 r180; Top Overlay "MISO" at 1515.67,3906.38 h39.37 r180